# Altium PCB Kicker_Board.PcbDoc
Units mil, origin at the board's own origin, x right, y up, seen from the top; angles counter-clockwise.
Board outline 6771.24 x 5242.97 mil, 2 copper layers (Top Layer, Bottom Layer); 51 components, 30 nets, 176 pads, 0 vias.
Unrouted connection lines stored in the file: 117.
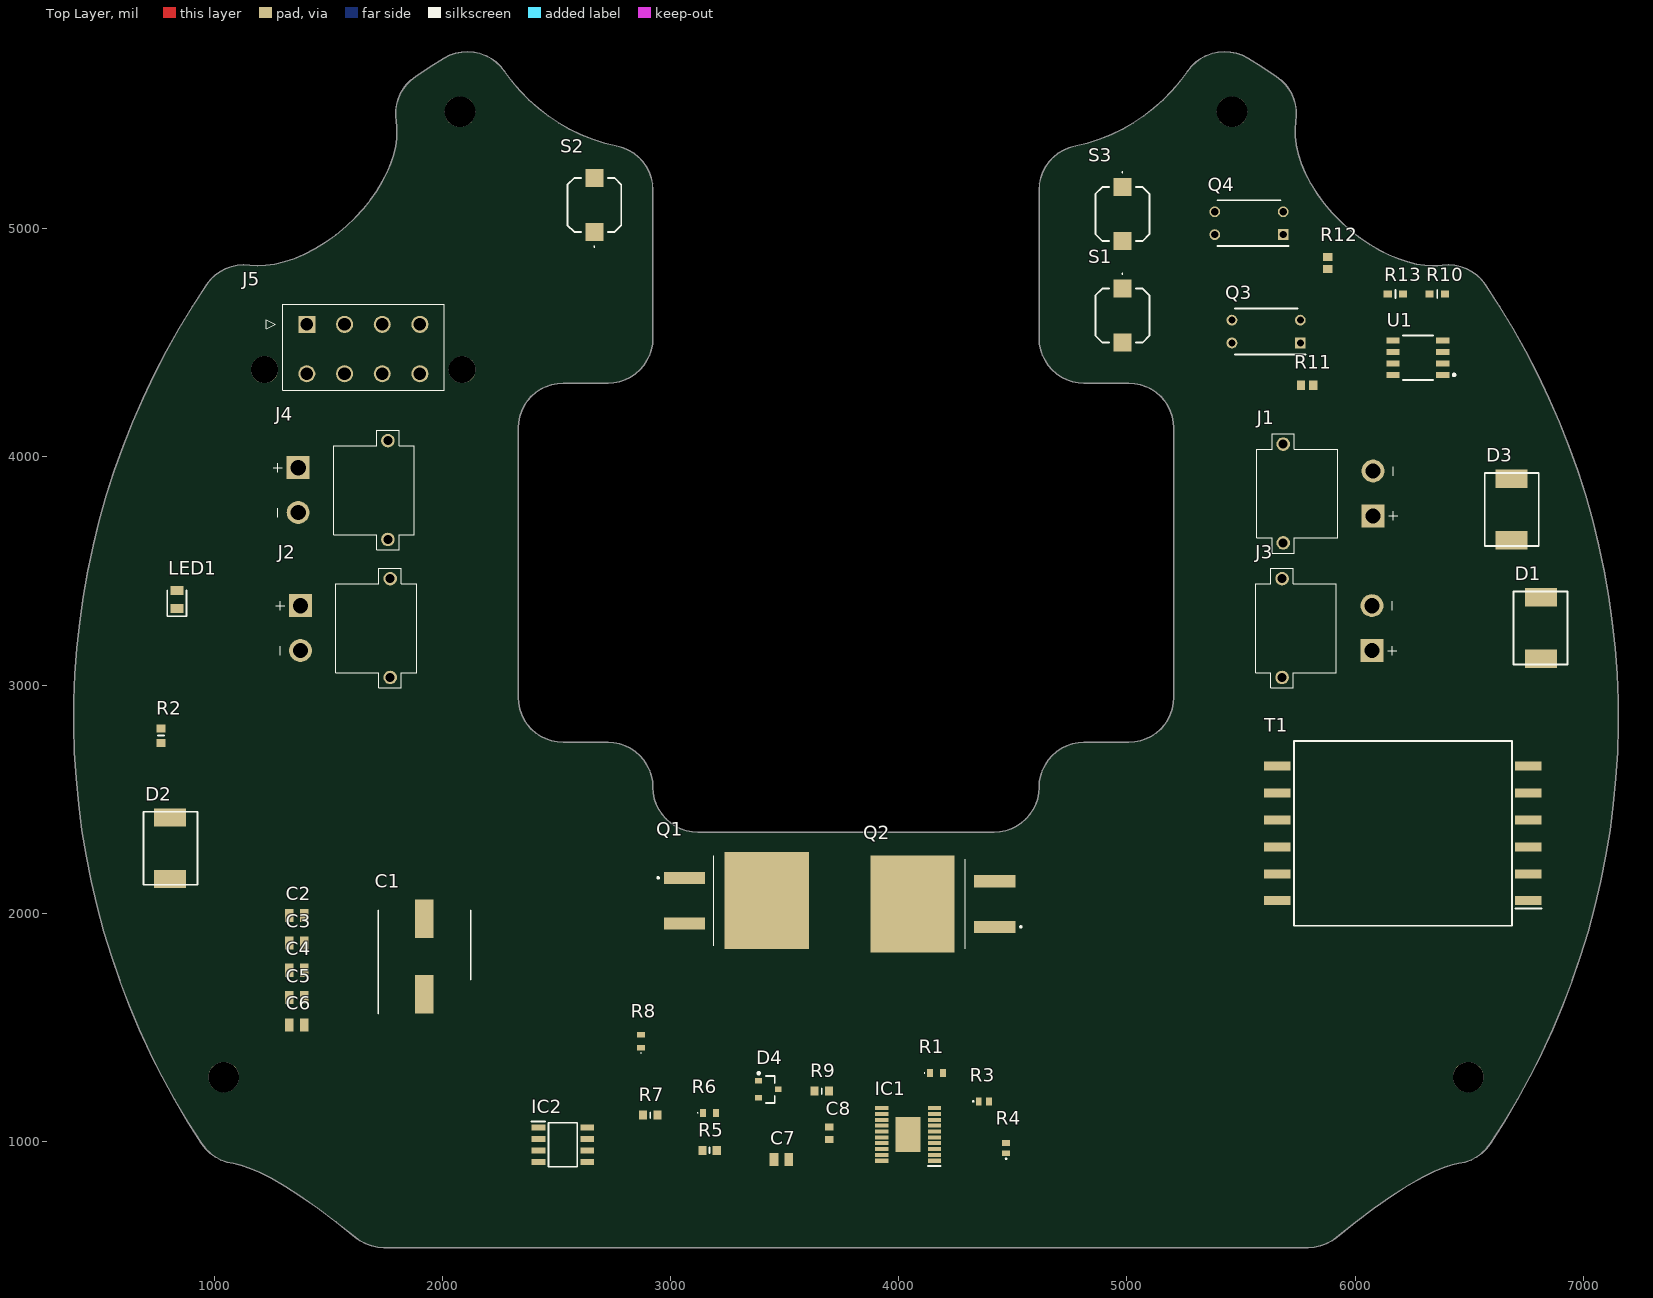
[diagram p0: Top Layer view]
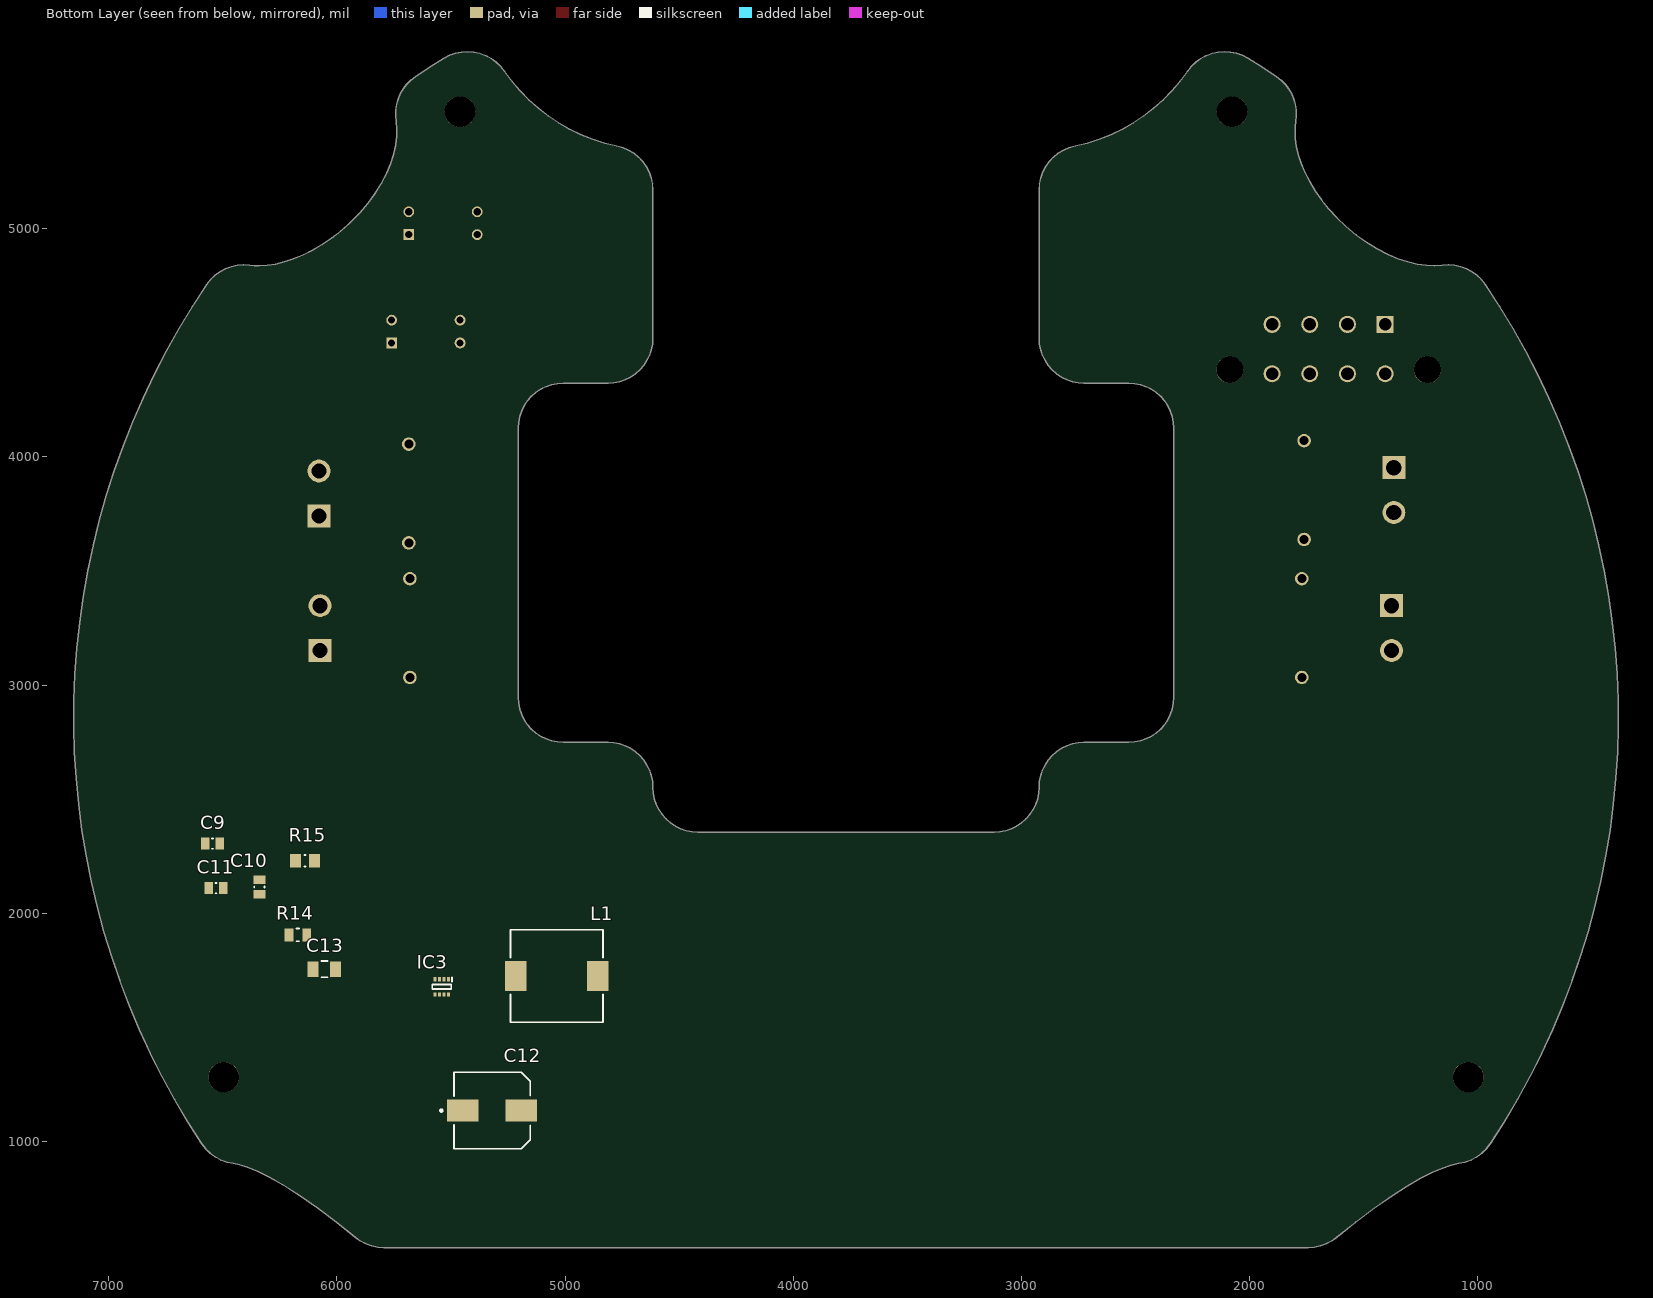
[diagram p1: Bottom Layer view, seen from below]

## Layer stack, top to bottom
Top Solder: solder mask 0.4, Solder Resist, Dk 3.5
Top Layer: signal copper 1.4
Dielectric 1: dielectric 12.6, FR-4, Dk 4.8
Bottom Layer: signal copper 1.4
Bottom Solder: solder mask 0.4, Solder Resist, Dk 3.5

## Board outline
390 vertices, not listed, extent 382.54,533.72 7153.78,5776.69

## Design rules (kind name [scope] priority, off if disabled: settings)
Clearance [All] p1: gap=10 ignorepadtopadclearanceinfootprint=FALSE
PolygonConnect [All] p1: connectstyle=Relief reliefconductorwidth=10 reliefentries=4 polygonreliefangle="90 Angle" airgapwidth=10
RoutingVias [All] p1: holewidth=28 width=50 viastyle="Through Hole" minholewidth=28 minwidth=50 maxholewidth=28 maxwidth=50
SolderMaskExpansion [All] p1: expansion=4 istentingtop=FALSE
Width [All] p1: maxlimit=10 minlimit=10 preferedwidth=10
30 further rules are at their usual default settings.

## Components (designator, comment, footprint, x,y, rotation, side; value= is the part's Value field where it differs from the comment)
C1 "220uF" CAPAE1030X1050N 1920,1810 r90 top
C2 "10uF" CAPC2012X145N 1360,1990 r0 top
C3 "10uF" CAPC2012X145N 1360,1870 r0 top
C4 "10uF" CAPC2012X145N 1360,1750 r0 top
C5 "10uF" CAPC2012X145N 1360,1630 r0 top
C6 "10uF" CAPC2012X145N 1360,1510 r0 top
C7 "10uF" CAPC2012X145N 3485,920 r0 top
C8 "100nF" CAPC1608X95N 3695,1035 r90 top
C9 "100nF" CAPC0805(2012)155_L 6545,2305 r180 bottom value=10uF
C10 "10uF" CAPC0805(2012)155_L 6340,2115 r90 bottom
C11 "4.7uF" CAPC0805(2012)155_L 6530,2110 r180 bottom value=10uF
C12 "UWT1H101MNL1GS" FP-UWT1H101MNL1GS-MFG 5320,1135 r180 bottom value=100uF
C13 "GMK316AB7106KL-TR" FP-1206-L_3_2_0_2-W_1_6_0-IPC_C 6055,1755 r180 bottom value=10uF
D1 "ES3J" Diode 6815,3250 r270 top
D2 "ES3J" Diode 805,2285 r90 top
D3 "ES3J" Diode 6685,3770 r90 top
D4 "BAS40" INF-SOT23_L 3428.31,1227.6 r0 top
IC1 "LT3751EFETRPBF" SOP65P640X120-21N 4040,1030 r180 top
IC2 "FDS2582" SOIC127P600X175-8N 2526.77,985 r0 top
IC3 "TPS563300DRLR" SOTFL50P160X60-8N 5540.47,1677.01 r270 bottom
J1 "XT30PW-M" AMASS_XT30PW-M 5685,3840 r90 top
J2 "XT30PW-M" AMASS_XT30PW-M 1770,3250 r270 top
J3 "XT30PW-M" AMASS_XT30PW-M 5680,3250 r90 top
J4 "XT30PW-M" AMASS_XT30PW-M 1760,3855 r270 top
J5 "172447-0608" 172447-YY08 1404.29,4581.54 r180 top
L1 "SRU1048-120Y" INDP100100X51N 5035.87,1725 r180 bottom
LED1 "SM0805HCL" LEDC2012X105N 835,3375 r90 top
Q1 "IKB40N65ES5ATMA1" BTS141TCBUMA1 3259.57,2055 r270 top
Q2 "IKB40N65ES5ATMA1" BTS141TCBUMA1 4220,2040 r90 top
Q3 "HCPL-817-000E" DIP762W60P254L460H400Q4N 5610,4550 r180 top
Q4 "HCPL-817-000E" DIP762W60P254L460H400Q4N 5535,5025 r180 top
R1 "24K9" ERJS03J155V 4165,1300 r0 top
R2 "100K" RESC1608X55N 765,2778.5 r270 top
R3 "133k" ERJUP3 4372.64,1175 r0 top
R4 "133k" ERJUP3 4470,970 r90 top
R5 "10K" RESC1608X55N 3170,960 r0 top
R6 "24K9" ERJS03J155V 3170,1125 r0 top
R7 "1K" RESC1608X55N 2910,1115 r0 top
R8 "24K9" ERJS03J155V 2870,1438.54 r90 top
R9 "10K" RESC1608X55N 3661.5,1220 r180 top
R10 "RC0603FR-073K3L" FP-RC0603-0_55-MFG 6360,4715 r180 top value=3.3kΩ
R11 "CRCW0603442RFKEA" RESC1609X50X30ML10T20 5790,4315 r0 top
R12 "CRCW0603442RFKEA" RESC1609X50X30ML10T20 5880,4850 r90 top
R13 "RC0603FR-073K3L" FP-RC0603-0_55-MFG 6176.54,4715 r0 top value=3.3kΩ
R14 "140K" FP-CRCW0805-e3-MFG 6171.61,1905 r180 bottom value=30kR
R15 "10K" FP-CRCW0805-e3-IPC_A 6140,2230 r180 bottom value=10kR
S1 "430133050816" 430133050816 4980,4620 r270 top
S2 "430133050816" 430133050816 2665,5105 r90 top
S3 "430133050816" 430133050816 4980,5065 r270 top
T1 "DA2034-ALD" SOP300P3000X1143-12N 6210,2350 r180 top
U1 "IR4426SPBF" FP-PG-DSO-8-MFG 6275,4435 r180 top

## Footprints (in the part's own frame and the unit in brackets; to place one, negate y for a bottom-side part, rotate by r counter-clockwise, add the part's x,y. Pads: shape width x height; smd on the part's side, far side on the other; paste and mask are expansions set on the pad)
172447-YY08 [mm]
  rect 1.9x1.9 hole 1.4: 1(0,0)
  round 1.9 hole 1.4: 2(-4.2,0) 3(-8.4,0) 4(-12.6,0) 5(0,5.5) 6(-4.2,5.5) 7(-8.4,5.5) 8(-12.6,5.5)
  round 3 hole 3 unplated: 9(4.7,5.04) 10(-17.3,5.04)
  silkscreen extent -15.3,-2.25 4.5,7.35, body extent -18.69,-2.25 6.09,8.75, height 12.75
430133050816 [mm]
  rect 2x2 smd: 1(-3,0) 2(3,0)
  silkscreen extent -4.7,-3 3,3, body extent -3.8,-3 3.8,3, height 5.3
AMASS_XT30PW-M [mm]
  round 2.55 hole 1.7: N(2.5,-10)
  rect 2.55x2.55 / inner round 2.55 / far side rect 2.55x2.55 hole 1.7: P(-2.5,-10)
  round 1.508 hole 1: S1(5.5,0) S2(-5.5,0)
  silkscreen extent -6.65,-12.75 6.65,2.95, body extent -6.65,-11 6.65,2.95, height 5
BTS141TCBUMA1 [mm]
  rect 1.35x4.6 smd: 1(-2.54,-5.075) 3(2.54,-5.075)
  rect 10.8x9.4 smd: 2(0,4.075)
  silkscreen extent -5,-8.1 5,-1.83
CAPAE1030X1050N [mm]
  rect 4.3x2.05 smd: 1(-4.2,0) 2(4.2,0)
  silkscreen extent -6.35,-5.15 5.15,5.15, body extent -5.65,-5.25 5.65,5.25, height 10.5
CAPC0805(2012)155_L [mm] "Chip Capacitor, Body 2.0x1.2mm, Height 1.55mm, IPC High Density"
  rect 0.95x1.35 smd: 1(-0.8,0) 2(0.8,0)
  silkscreen extent -0.05,-0.58 0.05,0.58, body extent -1.1,-0.72 1.1,0.72, height 1.55
CAPC1608X95N [mm]
  rect 0.78x0.98 smd: 1(-0.7,0) 2(0.7,0)
  body extent -0.8,-0.4 0.8,0.4, height 0.95
CAPC2012X145N [mm]
  rect 0.97x1.47 smd: 1(-0.83,0) 2(0.83,0)
  body extent -1,-0.63 1,0.63, height 1.45
Diode [mil]
  rect 80x140 smd: D1+(-135,0) D1-(135,0)
  silkscreen extent -160,-120 160,116, body extent -154,-116 154,116, height 95
DIP762W60P254L460H400Q4N [mm]
  rect 1.2x1.2 hole 0.8: 1(-3.81,1.27)
  round 1.2 hole 0.8: 2(-3.81,-1.27) 3(3.81,-1.27) 4(3.81,1.27)
  silkscreen extent -4.41,-2.55 3.5,2.55, body extent -3.96,-2.3 3.96,2.3, height 4
ERJS03J155V [mm]
  rect 0.65x0.9 smd: 1(-0.725,0) 2(0.725,0)
  silkscreen extent -1.35,-0.02 -1.3,0.02, body extent -0.8,-0.4 0.8,0.4, height 0.45
ERJUP3 [mm]
  rect 0.65x0.9 smd: 1(-0.575,0) 2(0.575,0)
  silkscreen extent -1.22,-0.05 -1.12,0.05, body extent -0.8,-0.4 0.8,0.4, height 0.55
FP-1206-L_3_2_0_2-W_1_6_0-IPC_C [mil]
  rect 47.42x67.17 smd paste+0 mask+0: 1(-49.25,0) 2(49.25,0)
  silkscreen extent -14,-35 14,35, body extent -63,-31 63,31, height 71
FP-CRCW0805-e3-IPC_A [mil]
  rect 47.5x59.38 smd paste+0 mask+0: 1(-41.37,0) 2(41.37,0)
  silkscreen extent -3,-25 3,25, body extent -39,-25 39,25, height 20
FP-CRCW0805-e3-MFG [mm]
  rect 0.95x1.45 smd paste+0 mask+0: 1(-0.975,0) 2(0.975,0)
  silkscreen extent -0.13,-0.7 0.13,0.7, body extent -1,-0.63 1,0.63, height 0.5
FP-PG-DSO-8-MFG [mm]
  rect 1.45x0.65 smd paste+0 mask+0: 1(-2.775,1.905) 2(-2.775,0.635) 3(-2.775,-0.635) 4(-2.775,-1.905) 5(2.775,-1.905) 6(2.775,-0.635) 7(2.775,0.635) 8(2.775,1.905)
  silkscreen extent -4.17,-2.49 1.68,2.49, body extent -3.6,-2.59 3.6,2.59, height 0.25
FP-RC0603-0_55-MFG [mm]
  rect 0.9x0.8 smd paste+0 mask+0: 1(-0.85,0) 2(0.85,0)
  silkscreen extent 0,-0.45 0,0.45, body extent -1.4,-0.55 1.4,0.55, height 0.25
FP-UWT1H101MNL1GS-MFG [mm]
  rect 3.5x2.5 smd paste+0 mask+0: 1(-3.25,0) 2(3.25,0)
  silkscreen extent -5.77,-4.25 4.25,4.25, body extent -4.45,-4.15 4.45,4.15, height 10.51
INDP100100X51N [mm] "Precision Wire Wound Inductor, 2-Leads, Body 10.00x10.00mm, IPC Medium Density"
  rect 2.4x3.3 smd: 1(-4.55,0) 2(4.55,0)
  silkscreen extent -5.15,-5.15 5.15,5.15, body extent -5.1,-5 5.1,5, height 5.2
INF-SOT23_L [mm] "SOT23, 3-Leads, Body 2.9x1.3 mm, Pitch 0.95 mm, IPC High Density"
  rect 0.75x0.6 smd: 1(-1.1,0.95) 2(-1.1,-0.95) 3(1.1,0)
  silkscreen extent -1.22,-1.5 0.7,1.92, body extent -0.7,-1.5 0.7,1.5, height 1.1
LEDC2012X105N [mm]
  rect 1x1.45 smd: 1(-1,0) 2(1,0)
  silkscreen extent -1.85,-1.07 1,1.07
RESC1608X55N [mm]
  rect 0.9x1 smd: 1(-0.8,0) 2(0.8,0)
  silkscreen extent 0,-0.33 0,0.33, body extent -0.8,-0.43 0.8,0.43, height 0.55
RESC1609X50X30ML10T20 [mm] "Chip Resistor, 2-Leads, Body 1.55x0.85mm, IPC Low Density"
  rect 0.9x1.05 smd: 1(-0.675,0) 2(0.675,0)
  body extent -0.82,-0.48 0.82,0.48, height 0.5
SOIC127P600X175-8N [mm]
  rect 1.525x0.65 smd: 1(-2.712,1.905) 2(-2.712,0.635) 3(-2.712,-0.635) 4(-2.712,-1.905) 5(2.712,-1.905) 6(2.712,-0.635) 7(2.712,0.635) 8(2.712,1.905)
  silkscreen extent -3.47,-2.45 1.6,2.58, body extent -3,-2.45 3,2.45, height 1.75
SOP65P640X120-21N [mm]
  rect 1.45x0.45 smd: 1(-2.925,2.925) 2(-2.925,2.275) 3(-2.925,1.625) 4(-2.925,0.975) 5(-2.925,0.325) 6(-2.925,-0.325) 7(-2.925,-0.975) 8(-2.925,-1.625) 9(-2.925,-2.275) 10(-2.925,-2.925) 11(2.925,-2.925) 12(2.925,-2.275) 13(2.925,-1.625) 14(2.925,-0.975) 15(2.925,-0.325) 16(2.925,0.325) 17(2.925,0.975) 18(2.925,1.625) 19(2.925,2.275) 20(2.925,2.925)
  rect 2.74x3.86 smd: 21(0,0)
  silkscreen extent -3.65,3.5 -2.2,3.5, body extent -3.2,-3.25 3.2,3.25, height 1.2
SOP300P3000X1143-12N [mm]
  rect 2.95x1 smd: 1(-13.975,7.5) 2(-13.975,4.5) 3(-13.975,1.5) 4(-13.975,-1.5) 5(-13.975,-4.5) 6(-13.975,-7.5) 7(13.975,-7.5) 8(13.975,-4.5) 9(13.975,-1.5) 10(13.975,1.5) 11(13.975,4.5) 12(13.975,7.5)
  silkscreen extent -15.45,-10.29 12.15,10.29, body extent -15,-10.29 15,10.29, height 11.43
SOTFL50P160X60-8N [mm]
  rect 0.475x0.3 smd: 1(-0.838,0.75) 2(-0.838,0.25) 3(-0.838,-0.25) 4(-0.838,-0.75) 5(0.838,-0.75) 6(0.838,-0.25) 7(0.838,0.25) 8(0.838,0.75)
  silkscreen extent -1.07,-1.05 0.25,1.15, body extent -0.8,-1.05 0.8,1.05, height 0.6

## Part data
C1: library part 865080657018, "Capacitor Polarised", Manufacturer_Name="Wurth Elektronik", Mouser Part Number=710-865080657018, Datasheet Link=https://www.we-online.com/catalog/datasheet/865080657018.pdf, Height=10.5mm, Manufacturer_Part_Number=865080657018, Mouser Price/Stock=https://www.mouser.co.uk/ProductDetail/Wurth-Elektronik/865080657018?qs=0KOYDY2FL28CcgHzg1XTuA%3D%3D
C2 C3 C4 C5 C6 C7: library part GRM21BR61H106KE43L, "Capacitor 10u", Manufacturer_Name="Murata Electronics", Mouser Part Number=81-GRM21BR61H106KE3L, Arrow Part Number=GRM21BR61H106KE43L, Arrow Price/Stock=https://www.arrow.com/en/products/grm21br61h106ke43l/murata-manufacturing?region=europe, Datasheet Link=http://www.murata.com/~/media/webrenewal/support/library/catalog/products/capacitor/mlcc/c02e.pdf, Height=1.45mm, Manufacturer_Part_Number=GRM21BR61H106KE43L, Mouser Price/Stock=https://www.mouser.co.uk/ProductDetail/Murata-Electronics/GRM21BR61H106KE43L?qs=lYGu3FyN48cBZlIduWKclg%3D%3D
C8: library part C0603C104K1RACAUTO, "Capacitor", Manufacturer_Name=KEMET, Mouser Part Number=80-C0603C104K1RAUTO, Arrow Part Number=C0603C104K1RACAUTO, Arrow Price/Stock=https://www.arrow.com/en/products/c0603c104k1racauto/kemet-corporation?region=europe, Datasheet Link=https://connect.kemet.com:7667/gateway/IntelliData-ComponentDocumentation/1.0/download/specsheet/C0603C104K1RACAUTO, Height=0.95mm, Manufacturer_Part_Number=C0603C104K1RACAUTO, Mouser Price/Stock=https://www.mouser.co.uk/ProductDetail/KEMET/C0603C104K1RACAUTO?qs=3Rah4i%252BhyCGTQ5uPNXtfZA%3D%3D
C9 C10 C11: library part CMP-1036-04916-1, "CAP 10uF 6.3V ±10% 0805 (2012 Metric) Thickness 1.55mm SMD", Case-EIA=0805, Case-Metric=2012, Rated Voltage="6.3 V", Tolerance=Â±10%, Max Thickness="1.55 mm", Technology=SMT
C12: library part CMP-2000-07373-2, "CAP ALUM 100UF 20% 50V SMD", Capacitance=100uF, Case/Package=Radial, Dielectric Material=Aluminium, Leakage Current=3uA, Max Operating Temperature=105°C, Min Operating Temperature=-55°C, Package Quantity=500, Ripple Current=140mA, Tolerance=20%, Voltage=50V, Construction=Cylindrical, Diameter=8mm, Dissipation Factor=0.14%, Height=10mm, Height - Seated (Max)=0.413inch, Lead Free="Lead Free", Length=10mm, Life (Hours)=1000Hour, Mount="Surface Mount", Number of Pins=2, Packaging="Tape and Reel", Radiation Hardening=No, REACH SVHC="No SVHC", Ripple Current (AC)=140mA, RoHS Compliant=Yes, Series=WT, Termination=SMD/SMT, Voltage Rating=50V, Voltage Rating (DC)=50V
C13: library part CMP-2000-06324-3, "None", Capacitance=10uF, Case Code (Imperial)=1206, Case Code (Metric)=3216, Dielectric=X7R, Max Operating Temperature=125°C, Min Operating Temperature=-55°C, Package Quantity=2000, Resistor Type=Ceramic, Tolerance=10%, Voltage Rating=35V, Case/Package=1206, Height=1.6mm, Length=0.126inch, Mount="Surface Mount", Packaging="Tape and Reel", REACH SVHC="No SVHC", RoHS Compliant=Yes, Series=M, Termination=SMD/SMT, Thickness=0.071inch, Voltage Rating (DC)=35V, Width=1.6mm
D4: library part CMP-1182-00023-1, "Silicon Schottky Diode, -55 to 150 degC, SOT23, Reel, Green", Manufacturer=Infineon, ComponentLink1Description="Manufacturer URL", ComponentLink1URL=http://www.infineon.com/, ComponentLink2Description=Datasheet, ComponentLink2URL=http://www.infineon.com/dgdl/bas40_bas140series.pdf?folderId=db3a30431400ef68011425f1ca2505e3&fileId=db3a304314dca389011518a57ed20e11, ComponentLink3Description="Package Specification", ComponentLink3URL=http://www.infineon.com/dgdl/SOT23-Package_Overview.pdf?folderId=db3a30431936bc4b0119532290053c66&fileId=db3a30431936bc4b0119533468123c85, Configuration=Single, CT (max)="5Â pF", Green=TRUE, IF (max)="120Â mA", Mounting Technology="Surface Mount", PackageDescription="3-Pin Small Outline Transistor Package, 1.3 x 2.9 mm Body, 0.95 mm Pitch", PackageReference=SOT23, PackageVersion=Apr-08, Packing=Reel, PartNumber=BAS40, VF (max)="1,000Â mV", VR (max)="40Â V"
IC1: "Integrated Circuit", Manufacturer_Name="Analog Devices", Datasheet Link=https://www.mouser.in/datasheet/2/609/3751fd-1269554.pdf, Height=1.2mm, Manufacturer_Part_Number=LT3751EFETRPBF
IC2: "Integrated Circuit", Manufacturer_Name=onsemi, Mouser Part Number=512-FDS2582, Arrow Part Number=FDS2582, Arrow Price/Stock=https://www.arrow.com/en/products/fds2582/on-semiconductor, Datasheet Link=https://www.onsemi.com/pub/Collateral/FDS2582-D.pdf, Height=1.75mm, Manufacturer_Part_Number=FDS2582, Mouser Price/Stock=https://www.mouser.co.uk/ProductDetail/ON-Semiconductor-Fairchild/FDS2582/?qs=9%2FFjV4%2Fi8epQRusZUcRtHQ%3D%3D
IC3: "Integrated Circuit", Manufacturer_Name="Texas Instruments", Mouser Part Number=595-TPS563300DRLR, Datasheet Link=https://www.ti.com/lit/ds/symlink/tps563300.pdf?ts=1666035990155&ref_url=https%253A%252F%252Fwww.ti.com%252Fproduct%252FTPS563300, Height=0.6mm, Manufacturer_Part_Number=TPS563300DRLR, Mouser Price/Stock=https://www.mouser.co.uk/ProductDetail/Texas-Instruments/TPS563300DRLR?qs=vvQtp7zwQdMDxJAw0dSlAg%3D%3D
J1 J2 J3 J4: "Socket; DC supply; XT30; male; PIN: 2; on PCBs; THT; Colour: yellow", Package=None, Availability="Not in stock", Check_prices=https://www.snapeda.com/parts/XT30PW-M/AMASS/view-part/?ref=eda, MF=AMASS, MP=XT30PW-M, Price=None, SnapEDA_Link=https://www.snapeda.com/parts/XT30PW-M/AMASS/view-part/?ref=snap
J5: "Connector", Manufacturer_Name=Molex, Mouser Part Number=538-172447-0608, Datasheet Link=https://www.molex.com/pdm_docs/sd/1724470406_sd.pdf, Height=12.8mm, Manufacturer_Part_Number=172447-0608, Mouser Price/Stock=https://www.mouser.co.uk/ProductDetail/Molex/172447-0608?qs=t7xnP681wgUaroQMnMhOkA%3D%3D
L1: "Inductor 12uH 4A", Arrow Part Number=CLF7045T-4R7N-D, Manufacturer_Name=TDK, Mouser Part Number=810-CLF7045T-4R7N-D, Arrow Price/Stock=https://www.arrow.com/en/products/clf7045t-4r7n-d/tdk, Datasheet Link=https://product.tdk.com/system/files/dam/doc/product/inductor/inductor/smd/wdcatalog/withdrawn_inductor_commercial_power_clf7045_en.pdf, Height=4.8mm, Manufacturer_Part_Number=CLF7045T-4R7N-D, Mouser Price/Stock=https://www.mouser.co.uk/ProductDetail/TDK/CLF7045T-4R7N-D?qs=ilIqL0%2F%2FoDU8gjMEHwFGUQ%3D%3D
LED1: "LED", Manufacturer_Name=Bivar, Mouser Part Number=749-SM0805HCL, Arrow Part Number=SM0805HCL, Arrow Price/Stock=https://www.arrow.com/en/products/sm0805hcl/bivar?region=nac, Datasheet Link=https://datasheet.datasheetarchive.com/originals/distributors/Datasheets-28/DSA-548818.pdf, Height=1.054mm, Manufacturer_Part_Number=SM0805HCL, Mouser Price/Stock=https://www.mouser.co.uk/ProductDetail/Bivar/SM0805HCL?qs=jaLxTFIJCiunRhy8mE7Amw%3D%3D
Q1 Q2: "Transistor IGBT", Manufacturer_Name=Infineon, Mouser Part Number=726-IKB40N65ES5ATMA1, Arrow Part Number=IKB40N65ES5ATMA1, Arrow Price/Stock=https://www.arrow.com/en/products/ikb40n65es5atma1/infineon-technologies-ag?region=nac, Datasheet Link=https://componentsearchengine.com/Datasheets/1/IKB40N65ES5ATMA1.pdf, Height=4.4mm, Manufacturer_Part_Number=IKB40N65ES5ATMA1, Mouser Price/Stock=https://www.mouser.co.uk/ProductDetail/Infineon-Technologies/IKB40N65ES5ATMA1?qs=MLItCLRbWsxz7jtfFbVz2w%3D%3D
Q3 Q4: "Transistor", Manufacturer_Name="Avago Technologies", Mouser Part Number=630-HCPL-817-000E, Datasheet Link=https://www.broadcom.com/products/optocouplers/industrial-plastic/other/phototransistor/hcpl-817-000e#overview, Height=4mm, Manufacturer_Part_Number=HCPL-817-000E, Mouser Price/Stock=https://www.mouser.co.uk/ProductDetail/Broadcom-Avago/HCPL-817-000E?qs=s%252BgfxR24RQ5Jtxo%2FTD122w%3D%3D
R1 R6 R8: library part ERJ-U03F2492V, "Resistor", Manufacturer_Name=Panasonic, Mouser Part Number=667-ERJ-U03F2492V, Datasheet Link=http://industrial.panasonic.com/cdbs/www-data/pdf/RDP0000/AOA0000C334.pdf, Height=0.55mm, Manufacturer_Part_Number=ERJ-U03F2492V, Mouser Price/Stock=https://www.mouser.co.uk/ProductDetail/Panasonic/ERJ-U03F2492V?qs=pdFhdcvjjggoxhbYOGQCqA%3D%3D
R2: library part CPF0603F100KC1, "Resistor", Manufacturer_Name="TE Connectivity", Mouser Part Number=279-CPF0603F100KC1, Arrow Part Number=CPF0603F100KC1, Arrow Price/Stock=https://www.arrow.com/en/products/cpf0603f100kc1/te-connectivity?region=nac, Datasheet Link=http://www.farnell.com/datasheets/1786775.pdf, Height=0.55mm, Manufacturer_Part_Number=CPF0603F100KC1, Mouser Price/Stock=https://www.mouser.co.uk/ProductDetail/TE-Connectivity-Holsworthy/CPF0603F100KC1?qs=n4i9pByFsMRwvDu9p24AYA%3D%3D
R3 R4: library part ERJ-UP3F1333V, "Resistor", Manufacturer_Name=Panasonic, Mouser Part Number=667-ERJ-UP3F1333V, Datasheet Link=https://industrial.panasonic.com/cdbs/www-data/pdf/RDP0000/AOA0000C337.pdf, Height=0.55mm, Manufacturer_Part_Number=ERJ-UP3F1333V, Mouser Price/Stock=https://www.mouser.co.uk/ProductDetail/Panasonic/ERJ-UP3F1333V?qs=GedFDFLaBXHzgPg3lbsA%252Bw%3D%3D
R5 R9: library part ERJ-U3RD1002V, "Resistor", Manufacturer_Name=Panasonic, Mouser Part Number=667-ERJ-U3RD1002V, Arrow Part Number=ERJ-U3RD1002V, Arrow Price/Stock=https://www.arrow.com/en/products/erj-u3rd1002v/panasonic?region=nac, Datasheet Link=https://industrial.panasonic.com/cdbs/www-data/pdf/RDP0000/RDP0000C343.pdf, Height=0.55mm, Manufacturer_Part_Number=ERJ-U3RD1002V, Mouser Price/Stock=https://www.mouser.co.uk/ProductDetail/Panasonic/ERJ-U3RD1002V?qs=TiOZkKH1s2Rg0qUjKdWcPw%3D%3D
R7: library part CHP0603QFX-1001ELF, "Resistor", Manufacturer_Name=Bourns, Mouser Part Number=652-CHP0603QFX-1001E, Arrow Part Number=CHP0603QFX-1001ELF, Arrow Price/Stock=https://www.arrow.com/en/products/chp0603qfx-1001elf/bourns?region=nac, Datasheet Link=http://www.bourns.com/docs/Product-Datasheets/CHP-Q.pdf, Height=0.55mm, Manufacturer_Part_Number=CHP0603QFX-1001ELF, Mouser Price/Stock=https://www.mouser.co.uk/ProductDetail/Bourns/CHP0603QFX-1001ELF?qs=8Wlm6%252BaMh8TVmVuLViesjw%3D%3D
R10 R13: library part CMP-1012-00567-3, Case Code (Imperial)=0603, Max Operating Temperature=155°C, Max Power Dissipation=100mW, Min Operating Temperature=-55°C, Resistance=3.3kΩ, Temperature Coefficient=100ppm/°C, Tolerance=1%, Voltage Rating=50V, Case Code (Metric)=0603, Case/Package=0603, Composition="Thick Film", Depth=800µm, Features="Moisture Resistant", Height=450µm, Lead Free="Lead Free", Length=1.6mm, Military Standard=Not, Mount="Surface Mount", NexarPartId=40011875, Number of Pins=2, Number of Terminations=2, Packaging="Tape & Reel", Power Rating=100mW, REACH SVHC="No SVHC", RoHS=Compliant, Schedule B="8533210045, 8533210045", Termination=SMD/SMT, Voltage Rating (AC)=50V, Voltage Rating (DC)=50V, Width=800µm
R11 R12: library part CMP-1012-00470-2, Manufacturer="Vishay Dale", Part Number=CRCW0603442RFKEA
R14: library part CMP-2001-03804-2, "RES Thick Film, 30kΩ, 1%, 0.125W, 100ppm/°C, 0805", Case Code (Imperial)=0805, Case Code (Metric)=2012, Max Operating Temperature=155°C, Max Power Dissipation=125mW, Min Operating Temperature=-55°C, Package Quantity=10, Resistance=30kR, Temperature Coefficient=100ppm/°C, Tolerance=1%, Voltage Rating=150V, Case/Package=0805, Composition="Thick Film", Contact Plating=Tin, Depth=1.25mm, Features="Automotive AEC-Q200", Height=0.45mm, Lead Free="Lead Free", Length=2mm, Military Standard=Not, Mount="Surface Mount", Number of Pins=2, Number of Terminations=2, Packaging="Tape and Reel", Power Rating=125mW, Radiation Hardening=No, Termination=SMD/SMT, Voltage Rating (DC)=150V, Weight=0.000194oz, Width=0.049inch
R15: library part CMP-2001-04908-2, "RES Thick Film, 10kΩ, 1%, 0.125W, 100ppm/°C, 0805", Case Code (Imperial)=0805, Case Code (Metric)=2012, Max Operating Temperature=155°C, Min Operating Temperature=-55°C, Package Quantity=5000, Power Rating=125mW, Resistance=10kR, Temperature Coefficient=100ppm/°C, Tolerance=1%, Voltage Rating=150V, Case/Package=0805, Composition="Thick Film", Contact Plating=Tin, Depth=1.25mm, Height=0.45mm, Lead Free="Lead Free", Length=2mm, Military Standard=Not, Packaging="Tape and Reel", Radiation Hardening=No, Termination=SMD/SMT, Voltage Rating (DC)=150V, Weight=0.000194oz, Width=1.25mm
S1 S2 S3: "Switch", Manufacturer_Name="Wurth Elektronik", Mouser Part Number=710-430133050816, Datasheet Link=https://www.we-online.com/components/products/datasheet/430133050816.pdf, Height=5.2mm, Manufacturer_Part_Number=430133050816, Mouser Price/Stock=https://www.mouser.co.uk/ProductDetail/Wurth-Elektronik/430133050816?qs=ufv2HEpFn%252BRy3i84BABEDg%3D%3D
T1: "Transformer", Manufacturer_Name=COILCRAFT, Mouser Part Number=994-DA2034-ALD, Datasheet Link=https://www.coilcraft.com/pdfs/da2032.pdf, Height=11.43mm, Manufacturer_Part_Number=DA2034-ALD, Mouser Price/Stock=https://www.mouser.co.uk/ProductDetail/Coilcraft/DA2034-ALD?qs=ZYnrCdKdyedtN304hL7iMg%3D%3D
U1: library part CMP-32851-000176-1, "IC GATE DRVR LOW-SIDE 8SOIC", Case/Package=SOIC, Max Operating Temperature=150°C, Max Output Current=3.3A, Max Supply Voltage=20V, Min Operating Temperature=-40°C, Min Supply Voltage=6V, Package Quantity=95, Channel Type=Independent, Fall Time=25ns, Halogen Free="Not Halogen Free", Height=0.059inch, Lead Free="Lead Free", Length=0.196inch, Mount="Surface Mount", Number of Channels=2, Number of Drivers=2, Number of Outputs=2, Number of Pins=8, Output Current=3.3A, Packaging=Rail/Tube, Propagation Delay=85ns, Reach SVHC Compliant=Yes, RoHS Compliant=Yes, Series=-, Width=0.157inch

## Free pads (board coordinates)
  round 133.86 hole 133.86: 1(1040.52,1281.75) 1(2075.87,5512.91) 1(5460.44,5512.91) 1(6495.8,1281.75)

## Nets (pads, with @x,y where several pads share a name; then routed paths per layer and width w, separated by ;. In a path a pad name is that pad's centre, name@x,y a point inside that pad or via, vN(x,y) a via of type N, cw(c..) or ccw(c..) an arc to the next point about the centre after c; other vN are vias at no path point)
12V: C7.2 C10.2 C11.2 IC1.13 IC1.14 L1.2 R4.1 R10.2 R13.2 S2.2 U1.6
CHARGE_BTN: D4.3 IC1.8 R9.2 S2.1
GND: C1.2 C2.2 C3.2 C4.2 C5.2 C6.2 C7.1 C8.1 C10.1 C11.1 C12.1 C13.2 IC1.3 IC1.5 IC1.9 IC1.21 IC2.1 IC2.2 IC2.3 IC3.4 J1.N J4.N J5.7 J5.8 LED1.1 Q1.3 Q2.1 Q2.3 Q3.2 Q3.3 Q4.2 Q4.3 R7.2 R9.1 S1.1 S3.1 T1.12 U1.3 U1.5
KICK_CHARGE: D4.1 J5.6
KICK_CHIP: J5.2 R12.1
KICK_DONE: C8.2 IC1.7 J5.5
KICK_LOW: J5.1 R11.1
NetC9_1: C9.1 IC3.5 L1.1 R14.1
NetC9_2: C9.2 IC3.6
NetD1_D1+: D1.D1+ D2.D1+ D3.D1+ J1.P J2.P J3.P J4.P R2.2
NetD1_D1-: D1.D1- T1.1
NetD2_D1-: D2.D1- J2.N Q1.2
NetD3_D1-: D3.D1- J3.N Q2.2
NetIC1_1: IC1.1 R1.1
NetIC1_2: IC1.2 R3.2
NetIC1_4: IC1.4 R4.2
NetIC1_15: IC1.15 R8.1
NetIC1_16: IC1.16 R7.1
NetIC1_18: IC1.18 R6.1
NetIC1_20: IC1.20 R5.1
NetIC2_4: IC2.4 R8.2
NetIC2_5: IC2.5 IC2.6 IC2.7 IC2.8 R5.2 R6.2 T1.7 T1.8 T1.9 T1.10
NetIC3_8: IC3.8 R14.2 R15.1
NetLED1_2: LED1.2 R2.1
NetQ1_1: Q1.1 U1.7
NetQ3_1: Q3.1 R11.2
NetQ3_4: Q3.4 R10.1 S1.2 U1.2
NetQ4_1: Q4.1 R12.2
NetQ4_4: Q4.4 R13.1 S3.2 U1.4
VBAT: C1.1 C2.1 C3.1 C4.1 C5.1 C6.1 C12.2 C13.1 IC3.3 J5.3 J5.4 R1.2 R3.1 T1.3 T1.4 T1.5 T1.6
pads on no net: D4.2 IC1.6 IC1.10 IC1.11 IC1.12 IC1.17 IC1.19 IC3.1 IC3.2 IC3.7 J1.S1 J1.S2 J2.S1 J2.S2 J3.S1 J3.S2 J4.S1 J4.S2 J5.9 J5.10 R15.2 T1.2 T1.11 U1.1 U1.8

## Silkscreen, mask and mechanical layers (free items; w line width, h text height)
Top Overlay: